# Altium PCB layout.PcbDoc
Units mil, origin at the board's own origin, x right, y up, seen from the top; angles counter-clockwise.
Board outline 1968.5 x 1968.5 mil, 2 copper layers (Top Layer, Bottom Layer); 48 components, 31 nets, 151 pads, 23 vias.
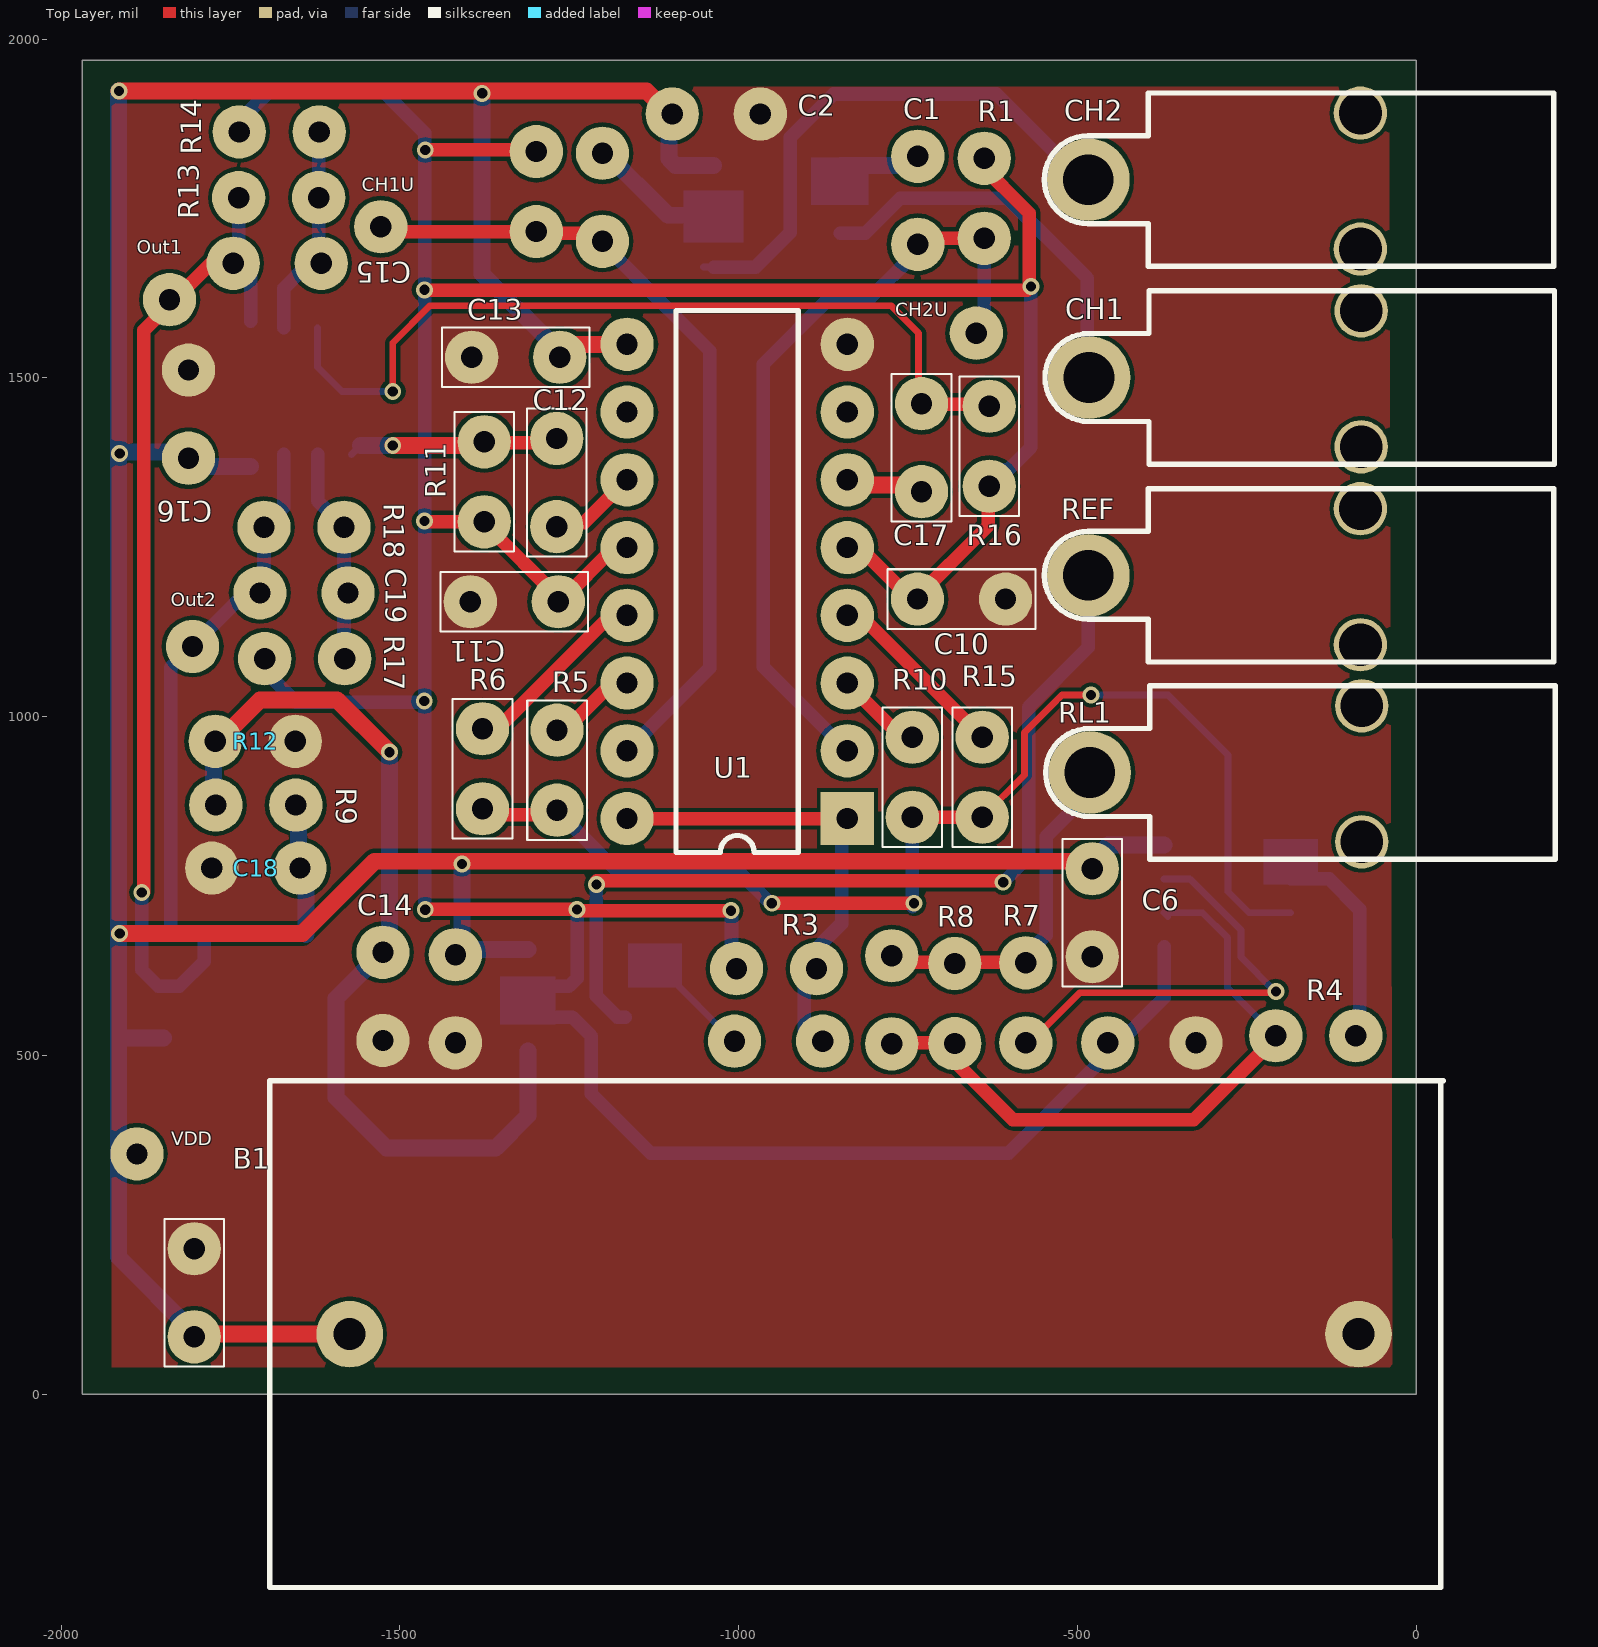
[diagram p0: Top Layer view]
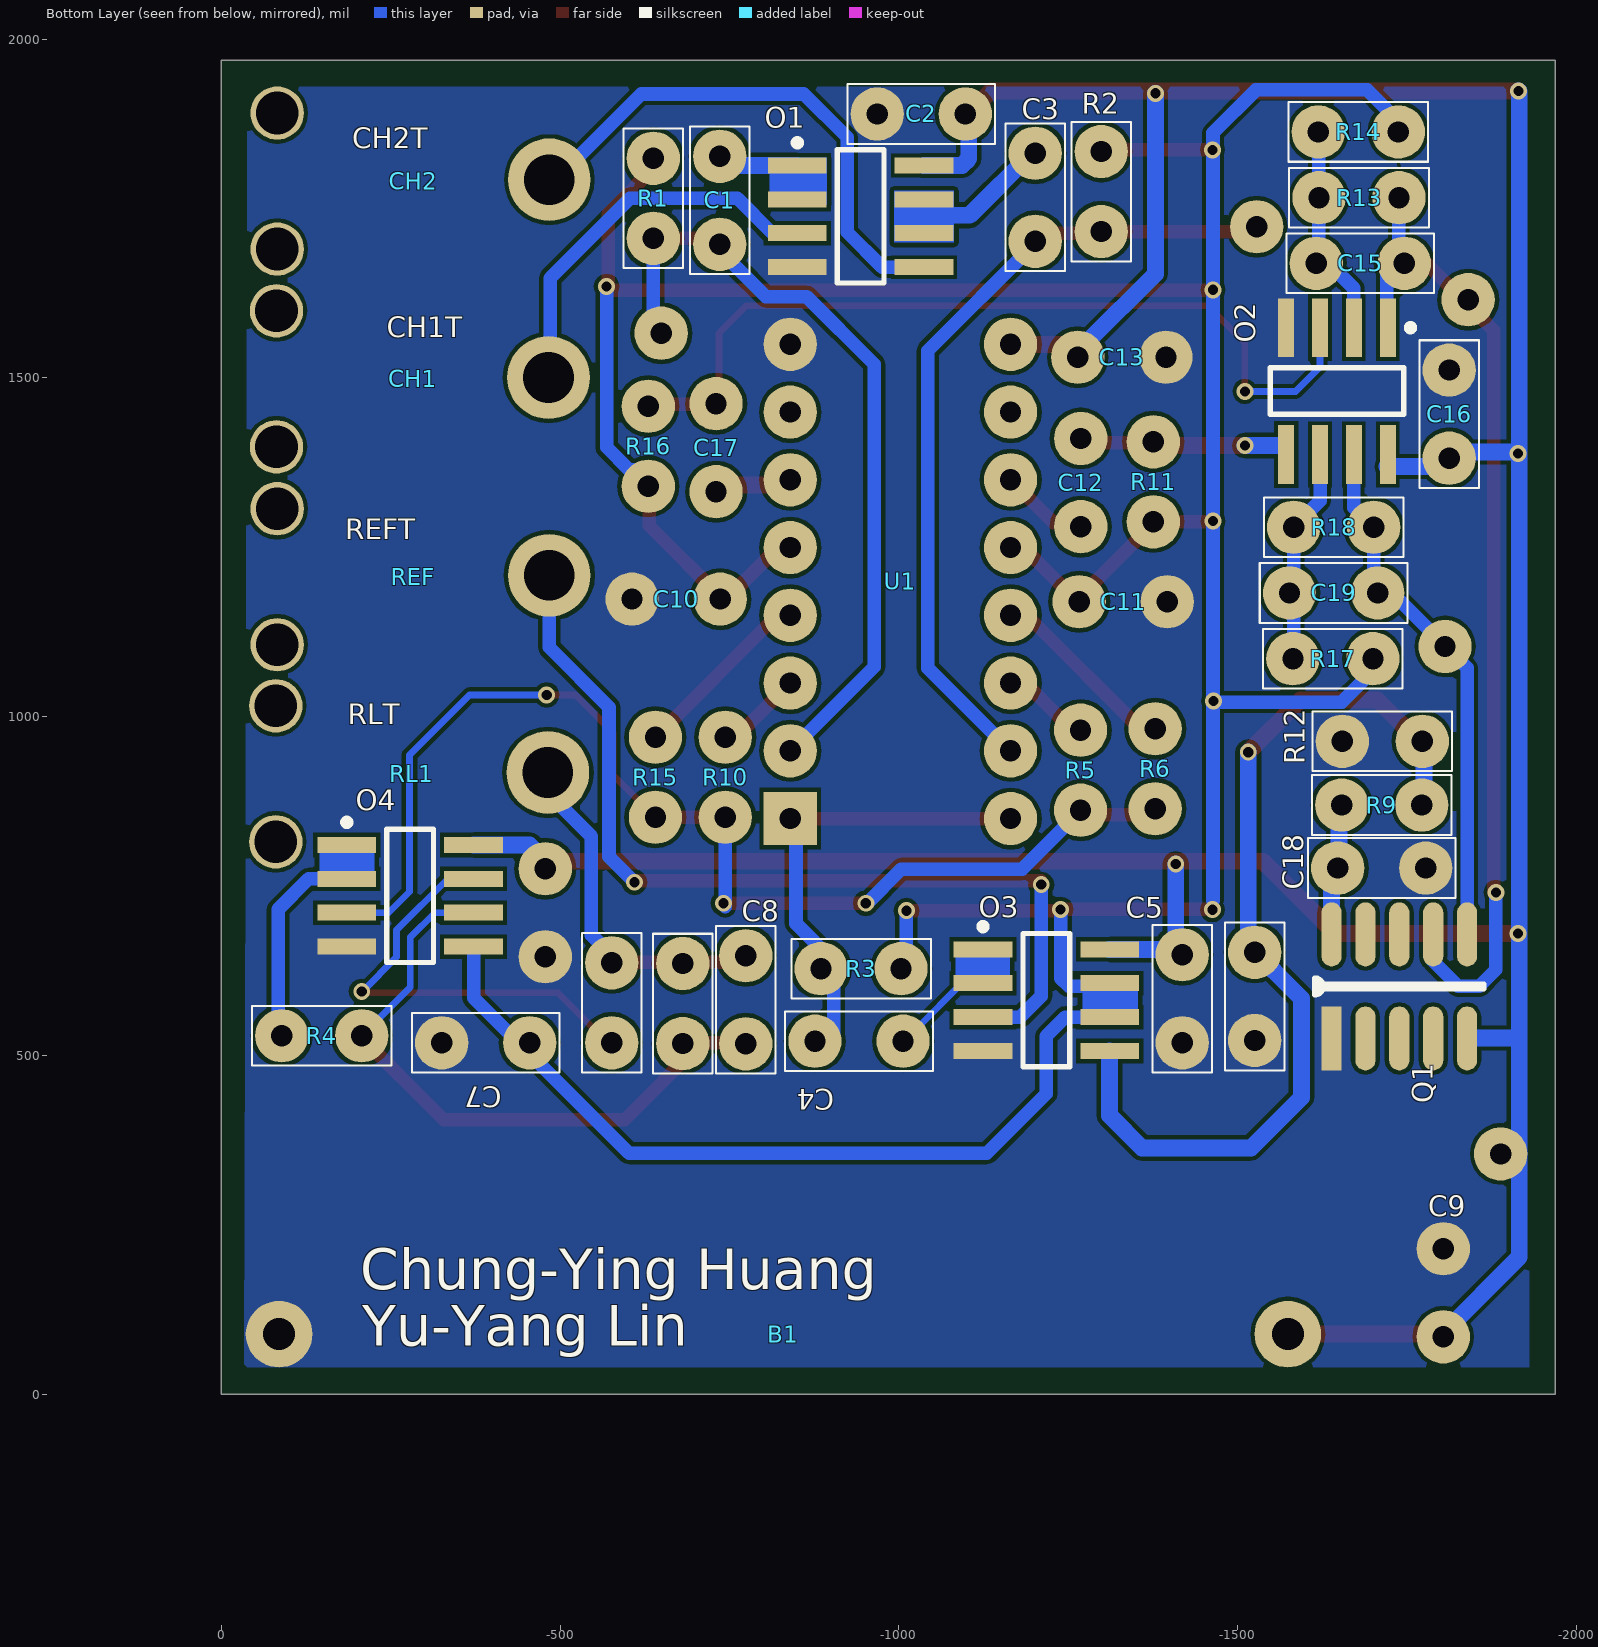
[diagram p1: Bottom Layer view, seen from below]

## Layer stack, top to bottom
Top Solder: solder mask 0.4, Solder Resist, Dk 3.5
Top Layer: signal copper 1.4
Dielectric 1: dielectric 12.6, FR-4, Dk 4.8
Bottom Layer: signal copper 1.4
Bottom Solder: solder mask 0.4, Solder Resist, Dk 3.5

## Board outline
-1968.5,0 0,0 0,1968.5 -1968.5,1968.5

## Design rules (kind name [scope] priority, off if disabled: settings)
Clearance ClearanceForHoleWithoutAnnularRing [IsPad And (HasRoundHole Or HasSlotHole)And (PadXSize_AllLayers=0) And (PadYSize_AllLayers=0)] p1: gap=10
Clearance [All] p2: gap=6
ComponentClearance [All] p1: gap=5 collisioncheckmode=3 verticalgap=0 showdistances=FALSE
HoleSize [All] p1: absolutevalues=TRUE maxlimit=100 minlimit=15 maxpercent=80.000 minpercent=20.000
HoleToHoleClearance [All] p1: gap=5.91 allowstackedmicrovias=TRUE
MinimumAnnularRing "Minimum IAR" [All] p1: minimumring=5
MinimumSolderMaskSliver [All] p1: minsoldermaskwidth=2.5
PolygonConnect [All] p1: connectstyle=Direct reliefconductorwidth=10 reliefentries=4 polygonreliefangle="90 Angle" airgapwidth=10
RoutingVias [All] p1: holewidth=15 width=25 viastyle="Through Hole" minholewidth=15 minwidth=25 maxholewidth=15 maxwidth=25
SilkToBoardRegionClearance [All] p1 off:
SilkToSilkClearance [All] p1 off: silktosilkclearance=4.5
SilkToSolderMaskClearance [IsPad] p1 off: minsilkscreentomaskgap=4.5 clearancetoexposedcopper=TRUE
SolderMaskExpansion [All] p1: expansion=3
UnpouredPolygon [All] p1: allowunpoured=FALSE
Width [All] p1: maxlimit=50 minlimit=6 preferedwidth=6
22 further rules are at their usual default settings.

## Components (designator, comment, footprint, x,y, rotation, side; value= is the part's Value field where it differs from the comment)
B1 "BatteryHolder_CR123A" BATTERHOLDER_CR123A -829.5,88.5 r180 bottom
C1 "Capacitor" CAPACITOR#1 -735.5,1762 r90 bottom
C2 "Capacitor" CAPACITOR#1 -1033,1889.5 r180 bottom
C3 "Capacitor" CAPACITOR#1 -1201,1766.5 r90 bottom
C4 "Capacitor" CAPACITOR#1 -941,521 r180 bottom
C5 "Capacitor" CAPACITOR#1 -1418,583.5 r90 bottom
C6 "Capacitor" CAPACITOR#1 -478,710.5 r90 top
C7 "Capacitor" CAPACITOR#1 -390,518.5 r0 bottom
C8 "Capacitor" CAPACITOR#1 -774,582 r270 bottom
C9 "Capacitor" CAPACITOR#2 -1803.5,149.5 r270 bottom
C10 "Capacitor" CAPACITOR#2 -671,1173.5 r0 bottom
C11 "Capacitor" CAPACITOR#2 -1331,1169.5 r180 bottom
C12 "Capacitor" CAPACITOR#2 -1268.5,1345.5 r90 bottom
C13 "Capacitor" CAPACITOR#2 -1329,1530.5 r180 bottom
C14 "Capacitor" CAPACITOR#2 -1525,587 r90 top
C15 "Capacitor" CAPACITOR#1 -1681,1669 r180 bottom
C16 "Capacitor" CAPACITOR#1 -1812,1446.5 r90 bottom
C17 "Capacitor" CAPACITOR#2 -730,1397 r270 bottom
C18 "Capacitor" CAPACITOR#2 -1712.5,776.5 r0 top
C19 "Capacitor" CAPACITOR#1 -1641.5,1182.5 r0 bottom
CH1 "Jack_36619_3pins" JACK_36619_3PADS -282,1498.5 r180 bottom
CH2 "Jack_36619_3pins" JACK_36619_3PADS -283,1790.5 r180 bottom
O1 "OPA2347_SOIC8" OPA2347P_SOIC8 -943.5,1738.5 r180 bottom
O2 "OPA2347_SOIC8" OPA2347P_SOIC8 -1646.5,1480.5 r270 bottom
O3 "OPA2347_SOIC8" OPA2347P_SOIC8 -1217.5,581.5 r180 bottom
O4 "OPA2347_SOIC8" OPA2347P_SOIC8 -278.5,735.5 r180 bottom
Q1 "Connector_20021121_10pins" 20021121-10PINS -1638.5,525 r90 bottom
R1 "Resistor" RESISITOR#1 -637.5,1765 r90 bottom
R2 "Resistor" RESISITOR#1 -1298.5,1775 r90 bottom
R3 "Resistor" RESISITOR#1 -944,628 r180 bottom
R4 "Resistor" RESISITOR#1 -148,529 r180 bottom
R5 "Resistor" RESISITOR#2 -1268,921 r270 bottom
R6 "Resistor" RESISITOR#2 -1378,923 r90 bottom
R7 "Resistor" RESISITOR#2 -576,577.5 r270 top
R8 "Resistor" RESISITOR#2 -681,576.5 r270 top
R9 "Resistor" RESISITOR#1 -1712.5,869.5 r0 bottom
R10 "Resistor" RESISITOR#2 -743.5,910.5 r270 bottom
R11 "Resistor" RESISITOR#2 -1375.5,1346.5 r90 bottom
R12 "Resistor" RESISITOR#2 -1713.5,963.5 r180 top
R13 "Resistor" RESISITOR#1 -1679,1766 r0 bottom
R14 "Resistor" RESISITOR#1 -1678,1863 r0 bottom
R15 "Resistor" RESISITOR#2 -640.5,910.5 r90 bottom
R16 "Resistor" RESISITOR#2 -630,1399 r90 bottom
R17 "Resistor" RESISITOR#1 -1640.5,1085.5 r0 bottom
R18 "Resistor" RESISITOR#1 -1641.5,1279.5 r180 bottom
REF "Jack_36619_3pins" JACK_36619_3PADS -283,1206.5 r180 bottom
RL1 "Jack_36619_3pins" JACK_36619_3PADS -281,915.5 r180 bottom
U1 "INA2126_DIP16" INA2126_DIP16 -839.5,849.5 r0 bottom

## Footprints (in the part's own frame and the unit in brackets; to place one, negate y for a bottom-side part, rotate by r counter-clockwise, add the part's x,y. Pads: shape width x height; smd on the part's side, far side on the other; paste and mask are expansions set on the pad)
20021121-10PINS [mm]
  rect 2.4x0.76 smd: 1(0,0)
  oval 2.4x0.76 smd: 2(3.9,0) 3(0,-1.27) 4(3.9,-1.27) 5(0,-2.54) 6(3.9,-2.54) 7(0,-3.81) 8(3.9,-3.81) 9(0,-5.08) 10(3.9,-5.08)
  silkscreen extent 1.63,-5.71 2.27,0.63
BATTERHOLDER_CR123A [mm]
  round 2.5 hole 1.2: 1(18.91,0) 2(-18.91,0)
CAPACITOR#1 [mm]
  round 2 hole 0.8: 1(-1.651,0) 2(1.651,0)
  silkscreen extent -2.77,-1.12 2.77,1.12
CAPACITOR#2 [mm]
  round 2 hole 0.8: 1(1.651,0) 2(-1.651,0)
INA2126_DIP16 [mm]
  rect 2x2 hole 0.8: 1(0,0)
  round 2 hole 0.8: 2(0,-2.54) 3(0,-5.08) 4(0,-7.62) 5(0,-10.16) 6(0,-12.7) 7(0,-15.24) 8(0,-17.78) 9(-8.26,-17.78) 10(-8.26,-15.24) 11(-8.26,-12.7) 12(-8.26,-10.16) 13(-8.26,-7.62) 14(-8.26,-5.08) 15(-8.26,-2.54) 16(-8.26,0)
JACK_36619_3PADS [mm]
  round 2 hole 1.6: 0(-5.1,-2.55) 0(-5.1,2.55)
  round 3.1 hole 1.9: 1(5.1,0.05)
OPA2347P_SOIC8 [mm]
  rect 2.2x0.6 smd: 1(-2.375,1.905) 2(-2.375,0.635) 3(-2.375,-0.635) 4(-2.375,-1.905) 5(2.375,-1.905) 6(2.375,-0.635) 7(2.375,0.635) 8(2.375,1.905)
  silkscreen extent -2.5,-2.5 0.88,2.88, body extent -0.9,-2.5 0.9,2.5, height 1.75
RESISITOR#1 [mm]
  round 2 hole 0.8: 1(-1.5,0) 2(1.5,0)
  silkscreen extent -2.62,-1.12 2.62,1.12
RESISITOR#2 [mm]
  round 2 hole 0.8: 1(1.5,0) 2(-1.5,0)

## Free pads (board coordinates)
  round 78.74 hole 31.5: 0(-1888,354.5) 0(-1840,1615.5) 0(-1806,1103.5) 0(-1528,1723) 0(-649,1566)

## Via types
v1: diameter 25, hole 15, Top Layer to Bottom Layer, 23 vias

## Nets (pads, with @x,y where several pads share a name; then routed paths per layer and width w, separated by ;. In a path a pad name is that pad's centre, name@x,y a point inside that pad or via, vN(x,y) a via of type N, cw(c..) or ccw(c..) an arc to the next point about the centre after c; other vN are vias at no path point)
CH1U: C1.1 pad.0@-649,1566 R1.1 U1.2 | length 1177.8
  Top Layer w20: C1.1@-732.5,1705.94 R1.1
  Bottom Layer w10: C1.1@-743.5,1680 C1.1@-743.5,1702.94
  Bottom Layer w20: U1.2 -963.5,1073.5 -963.5,1520 -863.5,1620 -803.5,1620 C1.1@-743.5,1680 ; C1.1@-735.5,1702.94 C1.1@-732.5,1705.94 ; pad.0@-646,1562 -637.5,1570.5 R1.1
CH2U: C3.1 pad.0@-1528,1723 R2.1 U1.15 | length 1221.6
  Top Layer w10: C3.1@-1179.5,1713.45 C3.1@-1178.5,1712.45
  Top Layer w20: pad.0@-1532,1715.94 R2.1 ; R2.1@-1284.5,1713.45 C3.1@-1179.5,1713.45
  Bottom Layer w10: C3.1@-1198.5,1696 C3.1@-1198.5,1715.94
  Bottom Layer w20: C3.1@-1198.5,1696 -1042.5,1540 -1042.5,1071.7 U1.15
GND: B1.2 C2.1 C5.1 C6.1 C7.2 C9.2 C10.1 C11.1 C13.1 C14.2 C16.2 C18.2 O1.4 O2.4 O3.4 O4.4 Q1.1 R12.2 U1.8
NetC1_2: C1.2 O1.1 O1.2 | length 113.6
  Bottom Layer w25: O1.1 -760.56,1813.5 C1.2@-743.5,1830.56
NetC3_2: C3.2 O1.6 O1.7 | length 214.9
  Bottom Layer w10: O1.7@-1018.19,1763.5 O1.7@-1012.28,1763.5
  Bottom Layer w25: C3.2@-1198.5,1834.05 -1104.45,1740 -1028.5,1740
NetC4_1: C4.1 R3.1 U1.1 U1.16 | length 678.5
  Top Layer w20: U1.16 U1.1
  Bottom Layer w10: C4.1@-903.45,525.5 C4.1@-901.45,523.5 ; U1.1@-848,841.01 U1.1
  Bottom Layer w20: C4.1@-903.45,525.5 -903.45,639.05 -848,694.5 U1.1@-848,841.01
NetC4_2: C4.2 O3.1 O3.2 | length 142.5
  Bottom Layer w10: O3.2 -1093.01,606.5 C4.2@-1026.56,540.05 ; C4.2@-1019.56,523.5 C4.2@-1019.56,541.05
NetC8_1: C8.1 R7.2 R8.2 RL1.1 | length 504
  Top Layer w20: C8.1@-800.5,637.56 R7.2@-605.5,637.56
  Bottom Layer w10: RL1.1@-483.29,885.72 RL1.1@-483.29,910.54
  Bottom Layer w20: R7.2@-575,639.5 -575,648.56 -546,677.56 -546,823.01 RL1.1@-483.29,885.72
NetC8_2: C8.2 O4.6 R4.2 R8.1 | length 994.8
  Top Layer w20: C8.2@-801.5,518.45 -708.5,518.45 -595.05,405 -328.06,405 R4.2@-201.56,531.5
  Bottom Layer w10: O4.6@-366.5,705 O4.6 -315,710.5 -278.5,674.01 -278.5,600.45 -209.56,531.5 R4.2@-201.56,531.5
NetC12_1: C12.1 O2.5 R11.1 | length 311.1
  Top Layer w10: R11.1@-1381.06,1400 R11.1 R11.1@-1374.5,1404.56
  Top Layer w20: R11.1@-1374.5,1404.56 C12.1@-1268.5,1404.56
  Top Layer w25: v1(-1510.5,1400) R11.1@-1381.06,1400
  Bottom Layer w10: O2.5 -1558.51,1400
  Bottom Layer w25: -1558.51,1400 v1(-1510.5,1400)
NetC12_2: C12.2 U1.11 | length 129.9
  Top Layer w20: C12.2@-1268.5,1286.45 -1227.76,1286.45 U1.11
NetC14_1: C14.1 O3.5 R9.1 R12.1 | length 1399.5
  Top Layer w25: R12.1@-1782.56,963.5 R12.1@-1764.5,963.5 ; R12.1@-1768.5,962.5 -1706.5,1024.5 -1592.5,1024.5 v1(-1515.5,947.5)
  Bottom Layer w10: R12.1@-1782.56,963.5 R12.1@-1775,955.94
  Bottom Layer w25: R9.1@-1781.56,869.5 -1775,876.06 R12.1@-1775,955.94 ; v1(-1515.5,947.5) -1515.5,662.56 -1594,584.06 -1594,438 -1519.5,363.5 -1358.5,363.5 -1311.01,411 O3.5
NetC15_1: C15.1 O2.2 R13.2 R14.2 | length 305.7
  Bottom Layer w10: C15.1@-1599.76,1659.88 C15.1@-1594.87,1659.88
  Bottom Layer w20: O2.2 -1671.5,1632 C15.1@-1637,1666.5 ; C15.1@-1619.45,1666.5 -1619.45,1764.5 R14.2@-1619.45,1860.5
NetC17_1: C17.1 U1.6 | length 84.7
  Top Layer w25: U1.6 -832,1342 C17.1@-757.95,1342
NetC17_2: C17.2 O2.3 R16.1 | length 1293.6
  Top Layer w10: v1(-1510.5,1480) -1510.5,1551.5 -1455.5,1606.5 -1379,1606.5 -775.01,1606.5 -734.5,1566 C17.2@-734.5,1461
  Top Layer w20: C17.2@-734.5,1461 -653.06,1461 R16.1@-631.5,1482.56
  Bottom Layer w10: O2.3 -1621.5,1516 -1585.5,1480 v1(-1510.5,1480) ; C17.2@-738.5,1487.56 C17.2@-734.5,1483.56
NetC19_2: C19.2 O2.6 R17.2 R18.1 | length 316.7
  Bottom Layer w20: O2.6 -1621.5,1318.56 R18.1 -1582.45,1182.5 R17.2@-1582.45,1086.5
NetCH1_1: CH1.1 O1.3 | length 589.6
  Bottom Layer w20: O1.3 -813,1713.5 -761.5,1765 -603,1765 -485.29,1647.29 CH1.1@-485.29,1492.54
NetCH2_1: CH2.1 O1.5 | length 811.7
  Bottom Layer w10: O1.5@-1052.01,1663.5 O1.5
  Bottom Layer w20: O1.5 -975,1663.5 -923.5,1715 -923.5,1855 -859.5,1919 -619.76,1919 CH2.1@-484.29,1783.54
NetO3_3: O3.3 REF.1 | length 1325.7
  Top Layer w20: v1@-1209.5,757.5 -611.5,757.5 v1(-609.5,755.5)
  Bottom Layer w20: v1(-1210,752) -1210,587.5 -1179.01,556.5 -1167.5,556.5 ; v1(-609.5,755.5) -572,793.01 -572,1014 -483.79,1102.21 REF.1
NetO4_1: O4.1 O4.2 R4.1 | length 304.2
  Bottom Layer w20: O4.2 -128.5,760.5 -83.45,715.45 R4.1@-83.45,531.5
NetO4_3: O4.3 R5.1 R6.2 R10.1 R15.2 | length 1730.5
  Top Layer w10: R15.2 -578,913.95 -578,976.5 -522.5,1032 v1(-480,1032)
  Top Layer w20: R6.2@-1364.5,855.45 R5.1@-1262.5,855.45 ; v1(-951,724.5) v1(-741,724.5) ; R10.1 R15.2
  Bottom Layer w10: v1(-480,1032) -366,1032 -277.5,943.5 -277.5,741.5 -246.5,710.5 O4.3
  Bottom Layer w20: R5.1@-1262.5,855.45 -1182.05,775 -1003.5,775 v1@-952,723.5 ; v1@-743.5,719.5 R10.1
NetO4_7: O4.7 R7.1 | length 686.8
  Top Layer w10: R7.1@-605.5,519.45 -569.05,519.45 -496,592.5 -209,592.5 v1(-207,594.5)
  Bottom Layer w10: O4.7 -334,760.5 -258.5,685.01 -258.5,645 -208.01,594.5 v1(-207,594.5)
NetR5_2: R5.2 U1.14 | length 129.3
  Top Layer w10: U1.14@-1186.56,1049.5 U1.14
  Top Layer w20: R5.2@-1262.5,973.56 U1.14@-1186.56,1049.5
NetR6_1: R6.1 U1.13 | length 272.7
  Top Layer w10: U1.13@-1188.56,1149.5 U1.13
  Top Layer w20: R6.1@-1364.5,973.56 U1.13@-1188.56,1149.5
NetR10_2: R10.2 U1.3 | length 129.1
  Top Layer w10: R10.2@-759.56,969.56 R10.2
  Top Layer w20: U1.3 R10.2@-759.56,969.56
NetR15_1: R15.1 U1.4 | length 273.5
  Top Layer w10: U1.4 U1.4@-820.45,1149.5
  Top Layer w20: U1.4@-820.45,1149.5 R15.1
OUT1: C15.2 O2.1 pad.0@-1840,1615.5 Q1.8 R13.1 | length 1517.7
  Top Layer w10: C15.2@-1763.5,1666.5 C15.2@-1737.56,1666.5 ; R13.1@-1760.5,1764.5 R13.1@-1737.56,1764.5
  Top Layer w20: v1@-1878,740.5 -1878,1570.01 -1775.01,1673 C15.2@-1730,1673
  Bottom Layer w10: C15.2@-1720.07,1652.8 C15.2@-1712.98,1659.88
  Bottom Layer w20: v1(-1881,740.5) -1881,626.5 -1856.49,602 -1825.5,602 -1788.5,639 Q1.8 ; C15.2@-1737.56,1666.5 R13.1@-1737.56,1764.5 ; O2.1@-1720.07,1583.66 C15.2@-1720.07,1652.8
OUT2: C19.1 O2.7 pad.0@-1806,1103.5 Q1.10 R18.2 | length 793
  Bottom Layer w20: Q1.10 -1838.5,1072 C19.1@-1704.91,1205.6 ; C19.1@-1700.56,1188.46 R18.2 -1671.5,1308.56 O2.7
VDD: B1.1 C2.2 C5.2 C6.2 C9.1 C13.2 C16.1 O1.8 O2.8 O3.8 O4.8 pad.0@-1888,354.5 Q1.9 U1.9 | length 5693.5
  Top Layer w25: v1(-1914.5,1923.5) -1136.06,1923.5 C2.2@-1102.56,1890 ; v1(-1913.5,680) -1644.01,680 -1537.5,786.5 -484.45,786.5 C6.2@-483.45,785.5 ; C16.1@-1809.45,1388.5 C16.1@-1807.5,1390.45 ; C9.1@-1801.56,88.5 B1.1 ; C13.2 -1244.99,1549.5 U1.9
  Bottom Layer w25: -1914.5,525.5 Q1.9@-1848.5,525.5 ; v1(-1914.5,1923.5) -1915.5,1922.5 -1915.5,202.45 C9.1@-1803.5,90.45 ; v1(-1913.5,1388.5) -1911.56,1390.45 C16.1@-1825.5,1390.45 ; C16.1@-1792.71,1368.11 -1791.72,1369.09 O2.8@-1720.07,1369.09 ; C5.2@-1414.5,647.56 C5.2@-1405.56,656.5 ; C5.2@-1408.5,647.56 v1(-1408.5,782.5) ; C5.2@-1399.56,656.5 O3.8 ; v1(-1378.5,1920) -1378.5,1653.5 -1278.5,1553.5 C13.2@-1266.45,1553.5 ; C13.2@-1264.45,1530 C13.2@-1247.45,1513 ; C2.2@-1103,1889.5 -1103,1823.5 -1093,1813.5 O1.8 ; C2.2@-1102.56,1879.06 C2.2@-1102.56,1890 ; C6.2@-481.5,783.56 -454.56,810.5 O4.8
VDDH: C7.1 C10.2 C11.2 O3.6 O3.7 O4.5 R1.2 R2.2 R3.2 R11.2 R14.1 R16.2 R17.1 U1.5 U1.12 | length 6034.6
  Top Layer w10: v1(-1463.5,1630) v1@-1463.01,1629.5 ; R11.2@-1375.5,1285.56 R11.2 ; R2.2@-1289.45,1836.5 R2.2@-1284.5,1831.56 ; U1.12@-1183.45,1249.5 U1.12 ; U1.5 U1.5@-821.56,1249.5
  Top Layer w20: v1@-1463.5,715.5 v1(-1238.5,715.5) -1236.5,713.5 v1(-1011,713.5) ; v1@-1463.01,1629.5 v1@-574,1629.5 ; v1(-1462.5,1836.5) R2.2@-1298.5,1836.5 ; v1@-1462.45,1287.45 R11.2 ; R11.2@-1375.5,1285.56 -1261.45,1171.5 U1.12@-1183.45,1249.5 ; U1.5@-821.56,1249.5 -742.56,1170.5 -631.5,1281.56 R16.2@-631.5,1364.45 ; R1.2@-646.5,1818.56 -570.87,1742.92 v1@-570.87,1637.36
  Bottom Layer w10: R3.2@-1025.5,629.45 R3.2@-1021.56,625.5
  Bottom Layer w20: R14.1@-1755.56,1860.5 -1691.06,1925 -1526.89,1925 -1463.5,1861.61 v1(-1463.5,1288.5) -1463.5,728.5 ; R17.1@-1717.56,1085.5 -1653.56,1021.5 v1@-1463.5,1021.5 ; O3.6 -1245.5,556.5 -1217.5,528.5 -1217.5,443.5 -1129.5,355.5 -601.56,355.5 -372.01,585.06 O4.5 ; O3.7@-1284,602 -1250.5,602 -1238.5,614 v1(-1238.5,715.5) ; R3.2@-1010.5,624.45 v1@-1010.5,714.61 ; R16.2@-627.56,1364.45 -601.55,1364.45 -568.5,1397.5 v1(-568.5,1635)
  other v1: -1462.5,715 -1464,1023
VKIT: C18.1 Q1.2 R9.2 | length 161.5
  Bottom Layer w25: C18.1@-1649.45,773.5 R9.2@-1649.45,861.5 ; Q1.2@-1638.5,678.05 C18.1@-1638.5,751.56
pads on no net: CH1.0 CH2.0 Q1.3 Q1.4 Q1.5 Q1.6 Q1.7 REF.0 RL1.0 U1.7 U1.10

## Polygon pours and split planes (outlines as drawn)
GND on Top Layer "MidLayer2-No Net" (solid, pour order 4): -40,1930 -1930,1930 -1925,1925 -1925,40 -35,40
GND on Bottom Layer "MidLayer2-No Net" (solid, pour order 6): -38.51,1930 -1930,1930 -1930,40 -33.51,40

## Other copper
Bottom Layer:
  rectangle net VDDH: -1352.5,545.5 -1270.5,616.5
  rectangle net NetC3_2: -1081.5,1699.5 -992.5,1776.5
  rectangle net NetO4_1: -225.5,752.5 -144.5,819.5
  rectangle net NetC1_2: -893.5,1755 -808.5,1825
  rectangle net NetC4_2: -1163.5,600 -1083.5,665

## Silkscreen, mask and mechanical layers (free items; w line width, h text height)
Top Overlay:
  text "CH1U" at -1556,1775.5 h20
  text "Out1" at -1888.5,1683 h20
  text "CH2U" at -769,1591 h20
  text "Out2" at -1838.5,1163 h20
  text "VDD" at -1837.5,367 h20
Bottom Overlay:
  text "CH2T" at -193,1839 h30
  text "CH1T" at -244,1560 h30
  text "REFT" at -183,1262 h30
  text "RLT" at -186,989 h30
  text "Chung-Ying Huang" at -205,154.5 h60
  text "Yu-Yang Lin" at -208,71.5 h60
Mechanical 1:
  the board outline again, w7.87